# Altium PCB ThermometerMain.PcbDoc
Units mm, origin at the board's own origin, x right, y up, seen from the top; angles counter-clockwise.
Board outline 110 x 55 mm, 2 copper layers (Top Layer, Bottom Layer); 5 components, 23 nets, 42 pads, 0 vias.
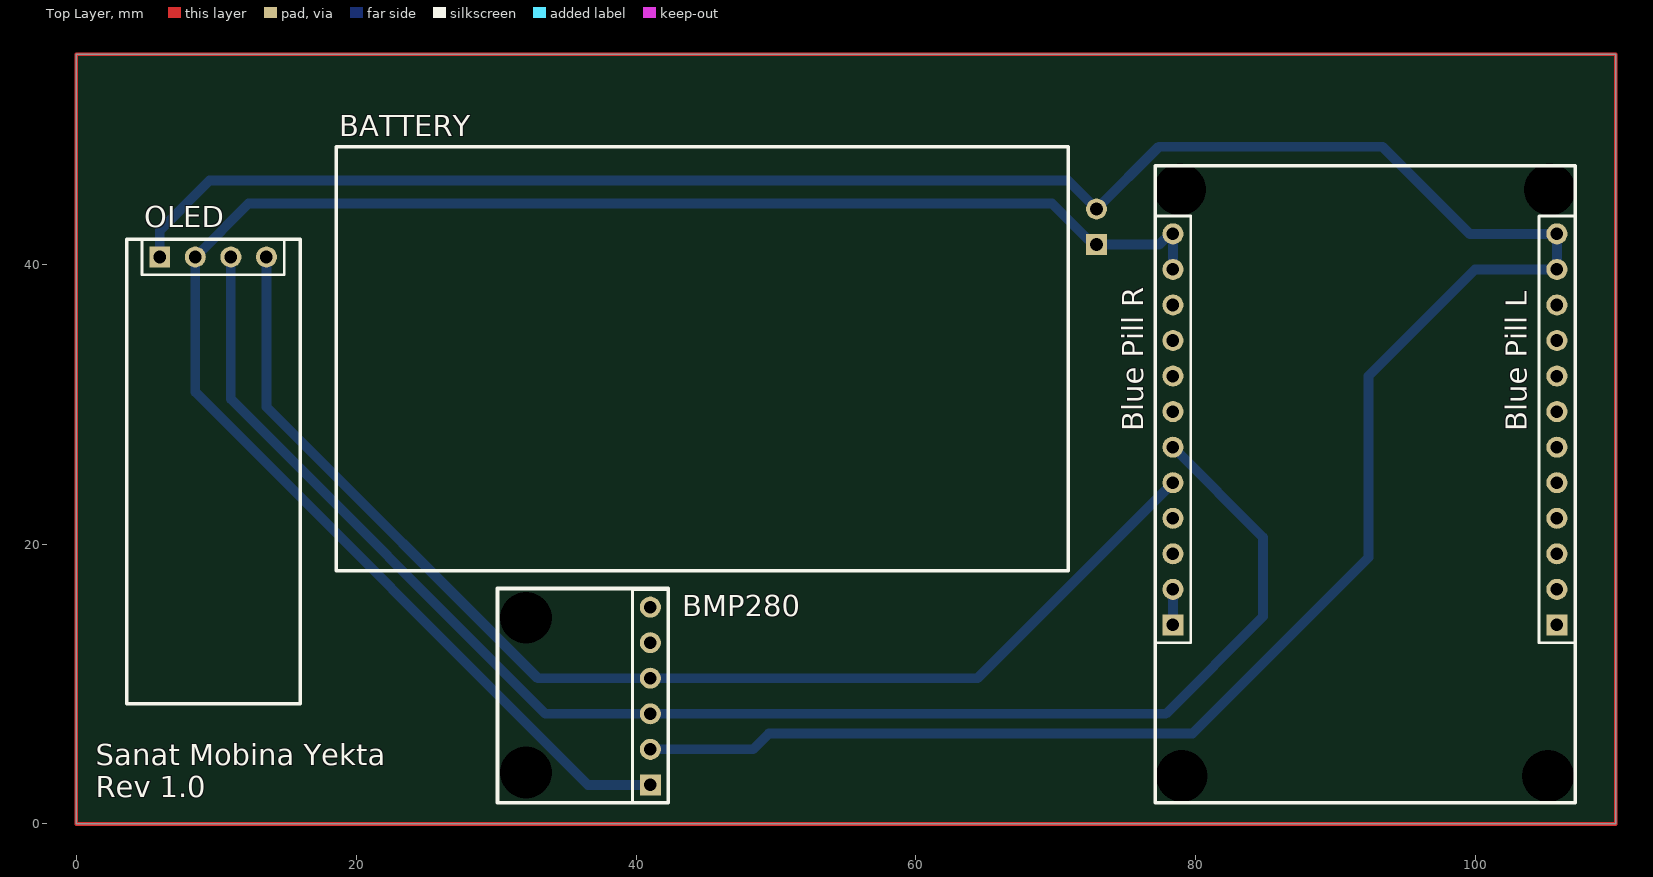
[diagram p0: Top Layer view]
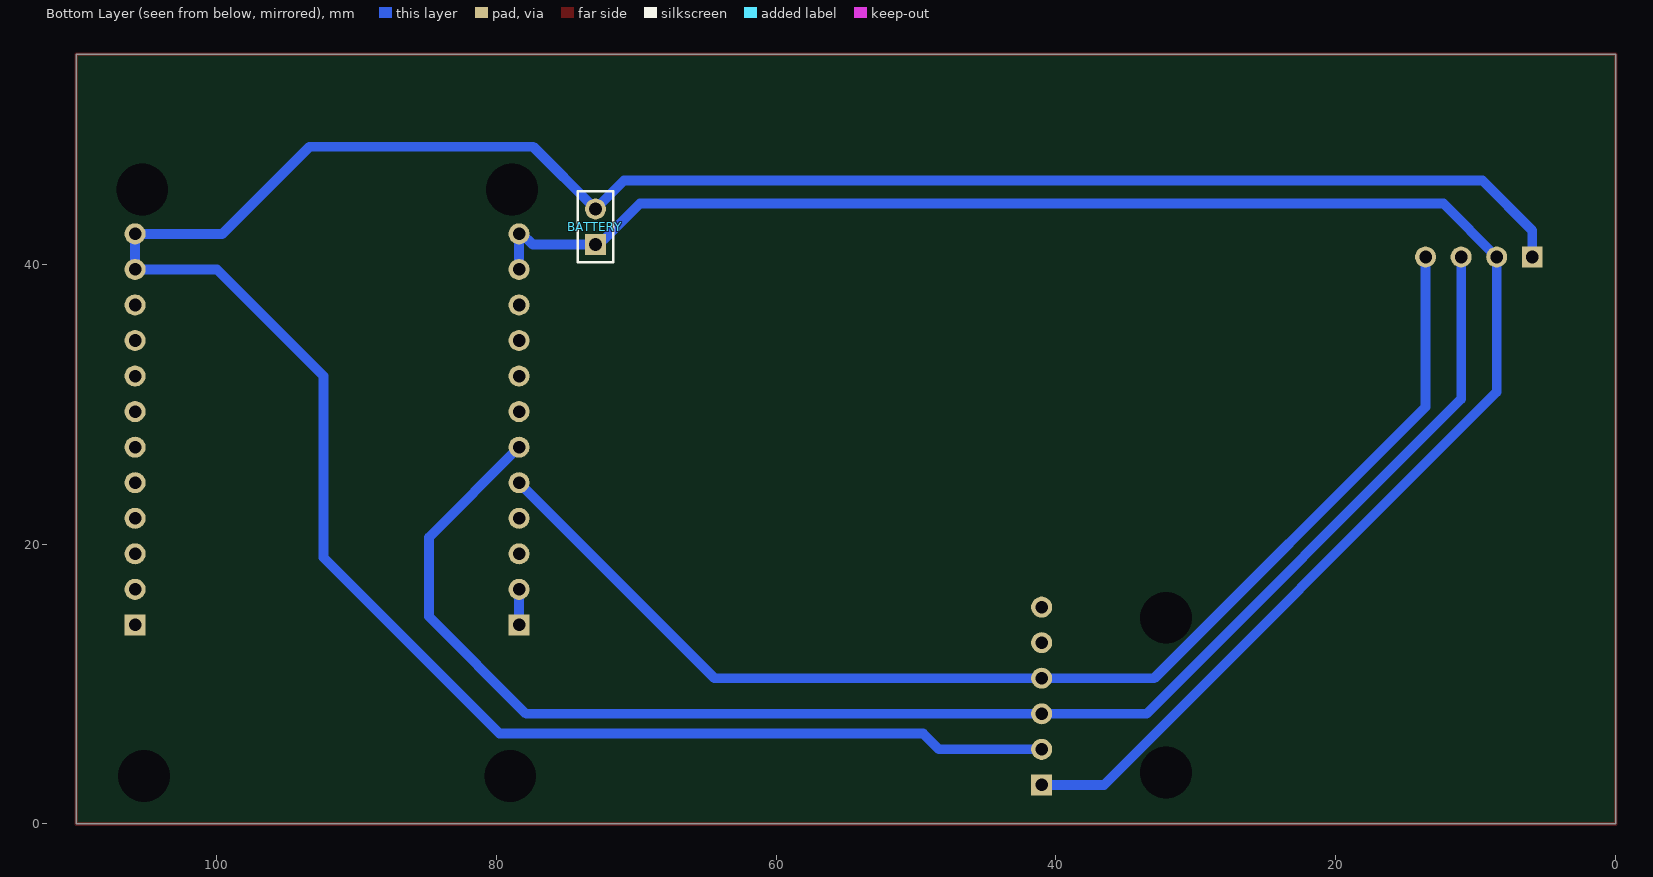
[diagram p1: Bottom Layer view, seen from below]

## Layer stack, top to bottom
Top Solder: solder mask 0.0102, Solder Resist, Dk 3.5
Top Layer: signal copper 0.0356
Dielectric 1: dielectric 0.32, FR-4, Dk 4.8
Bottom Layer: signal copper 0.0356
Bottom Solder: solder mask 0.0102, Solder Resist, Dk 3.5

## Board outline
0,0 0,55 110,55 110,0

## Design rules (kind name [scope] priority, off if disabled: settings)
Clearance [All] p1: gap=0.254 ignorepadtopadclearanceinfootprint=FALSE except(0: Arc-Hole Track-Hole SMDPad-Hole THPad-Hole Via-Hole Fill-Hole Poly-Hole Region-Hole Text-Hole; 0.7: Arc-Arc Arc-Track Track-Track)
PolygonConnect [All] p1: connectstyle=Relief reliefconductorwidth=0.254 reliefentries=4 polygonreliefangle="90 Angle" airgapwidth=0.254
RoutingVias [All] p1: holewidth=0.711 width=1.27 viastyle="Through Hole" minholewidth=0.711 minwidth=1.27 maxholewidth=0.711 maxwidth=1.27
SolderMaskExpansion [All] p1: expansion=0.102 istentingtop=FALSE
Width [All] p1: maxlimit=1 minlimit=0.5 preferedwidth=0.7 minimp=50.000000 maximp=50.000000 favimp=50.000000
30 further rules are at their usual default settings.

## Components (designator, comment, footprint, x,y, rotation, side; value= is the part's Value field where it differs from the comment)
BATTERY "Header 2" HDR1X2 72.898,41.402 r90 bottom
"Blue Pill L" "Header 12" HDR1X12 105.791,14.224 r90 top
"Blue Pill R" "Header 12" HDR1X12 78.359,14.224 r90 top
BMP280 "Header 6" HDR1X6 41.021,2.794 r90 top
OLED "Header 4" HDR1X4 5.969,40.513 r0 top

## Footprints (in the part's own frame and the unit in brackets; to place one, negate y for a bottom-side part, rotate by r counter-clockwise, add the part's x,y. Pads: shape width x height; smd on the part's side, far side on the other; paste and mask are expansions set on the pad)
HDR1X2 [mm] "Connector; Header; 2 Position"
  rect 1.5x1.5 hole 0.9: 1(0,0)
  round 1.5 hole 0.9: 2(2.54,0)
  silkscreen extent -1.27,-1.27 3.81,1.27, body extent -1.27,-1.28 3.81,1.26, height 8.79
HDR1X4 [mm] "Connector; Header; 4 Position"
  rect 1.5x1.5 hole 0.9: 1(0,0)
  round 1.5 hole 0.9: 2(2.54,0) 3(5.08,0) 4(7.62,0)
  silkscreen extent -1.27,-1.27 8.89,1.27, body extent -1.27,-1.28 8.89,1.26, height 8.38
HDR1X6 [mm] "Connector; Header; 6 Position"
  rect 1.5x1.5 hole 0.9: 1(0,0)
  round 1.5 hole 0.9: 2(2.54,0) 3(5.08,0) 4(7.62,0) 5(10.16,0) 6(12.7,0)
  silkscreen extent -1.27,-1.27 13.97,1.27, body extent -1.26,-1.25 13.98,1.29, height 8.38
HDR1X12 [mm] "Connector; Header; 12 Position"
  rect 1.5x1.5 hole 0.9: 1(0,0)
  round 1.5 hole 0.9: 2(2.54,0) 3(5.08,0) 4(7.62,0) 5(10.16,0) 6(12.7,0) 7(15.24,0) 8(17.78,0) 9(20.32,0) 10(22.86,0) 11(25.4,0) 12(27.94,0)
  silkscreen extent -1.27,-1.27 29.21,1.27

## Part data
BATTERY: "Header, 2-Pin", LatestRevisionDate=17-Jul-2002, LatestRevisionNote="Re-released for DXP Platform.", Publisher="Altium Limited"
"Blue Pill L" "Blue Pill R": "Header, 12-Pin", LatestRevisionDate=17-Jul-2002, LatestRevisionNote="Re-released for DXP Platform.", Publisher="Altium Limited"
BMP280: "Header, 6-Pin", LatestRevisionDate=17-Jul-2002, LatestRevisionNote="Re-released for DXP Platform.", Publisher="Altium Limited"
OLED: "Header, 4-Pin", LatestRevisionDate=17-Jul-2002, LatestRevisionNote="Re-released for DXP Platform.", Publisher="Altium Limited"

## Free pads (board coordinates)
  round 0 / inner round 1.5 / far side round 0 hole 3.7: (78.867,45.339) (105.283,45.339) ""(32.131,3.683) ""(32.131,14.732) ""(78.994,3.429) ""(105.156,3.429)

## Nets (pads, with @x,y where several pads share a name; then routed paths per layer and width w, separated by ;. In a path a pad name is that pad's centre, name@x,y a point inside that pad or via, vN(x,y) a via of type N, cw(c..) or ccw(c..) an arc to the next point about the centre after c; other vN are vias at no path point)
3V3: "Blue Pill R.11" "Blue Pill R.12" BATTERY.1 BMP280.1 OLED.2 | length 129.3
  Bottom Layer w0.7: BMP280.1 36.576,2.794 8.509,30.861 OLED.2 12.319,44.323 69.723,44.323 72.244,41.802 72.498,41.802 BATTERY.1 77.381,41.402 78.143,42.164 78.359,42.164 78.359,39.624
5V: "Blue Pill R.1" "Blue Pill R.2" | length 2.5
  Bottom Layer w0.7: 78.359,14.224 78.359,16.764
BOOT0: "Blue Pill L.1"
CSB: BMP280.5
GND: "Blue Pill L.11" "Blue Pill L.12" BATTERY.2 BMP280.2 OLED.1 | length 197.6
  Bottom Layer w0.7: OLED.1 5.969,42.418 9.525,45.974 70.866,45.974 BATTERY.2 77.343,48.387 93.345,48.387 99.568,42.164 105.791,42.164 105.791,39.624 99.949,39.624 92.329,32.004 92.329,19.05 79.753,6.474 49.486,6.474 48.346,5.334 BMP280.2
NRST: "Blue Pill L.4"
PA0: "Blue Pill L.6"
PA1: "Blue Pill L.7"
PA2: "Blue Pill L.8"
PA3: "Blue Pill L.9"
PA4: "Blue Pill L.10"
PA5: "Blue Pill R.10"
PA6: "Blue Pill R.9"
PA7: "Blue Pill R.8"
PA9: "Blue Pill R.6" BMP280.3 OLED.3 | length 110.6
  Bottom Layer w0.7: OLED.3 11.049,30.364 33.539,7.874 BMP280.3@40.805,7.874 ; BMP280.3 77.851,7.874 84.8,14.823 84.8,20.483 78.359,26.924
PA10: "Blue Pill R.5" BMP280.4 OLED.4 | length 89.3
  Bottom Layer w0.7: OLED.4 13.589,29.804 32.979,10.414 64.389,10.414 78.359,24.384
PA13: "Blue Pill R.4"
PA14: "Blue Pill R.3"
PB1: "Blue Pill R.7"
PF0: "Blue Pill L.2"
PF1: "Blue Pill L.3"
SDO: BMP280.6
VDDA: "Blue Pill L.5"
copper on no net: | length 330
  Top Layer w0.254: 0,0 110,0 110,55 0,55 0,0

## Silkscreen, mask and mechanical layers (free items; w line width, h text height)
Top Overlay:
  lines w0.254: 3.602,8.583 16.002,8.583 16.002,41.783 3.602,41.783 3.602,8.583 ; 18.566,18.087 70.866,18.087 70.866,48.387 18.566,48.387 18.566,18.087 ; 30.099,1.524 30.099,16.824 42.299,16.824 42.299,1.524 30.099,1.524 ; 77.089,1.524 77.089,47.024 107.089,47.024 107.089,1.524 77.089,1.524
  text "Sanat Mobina Yekta / Rev 1.0" at 1.397,1.905 h1.52